# EAGLE board TN Deck _Main Board (EAGLE 9.7.0), part 1 of 2
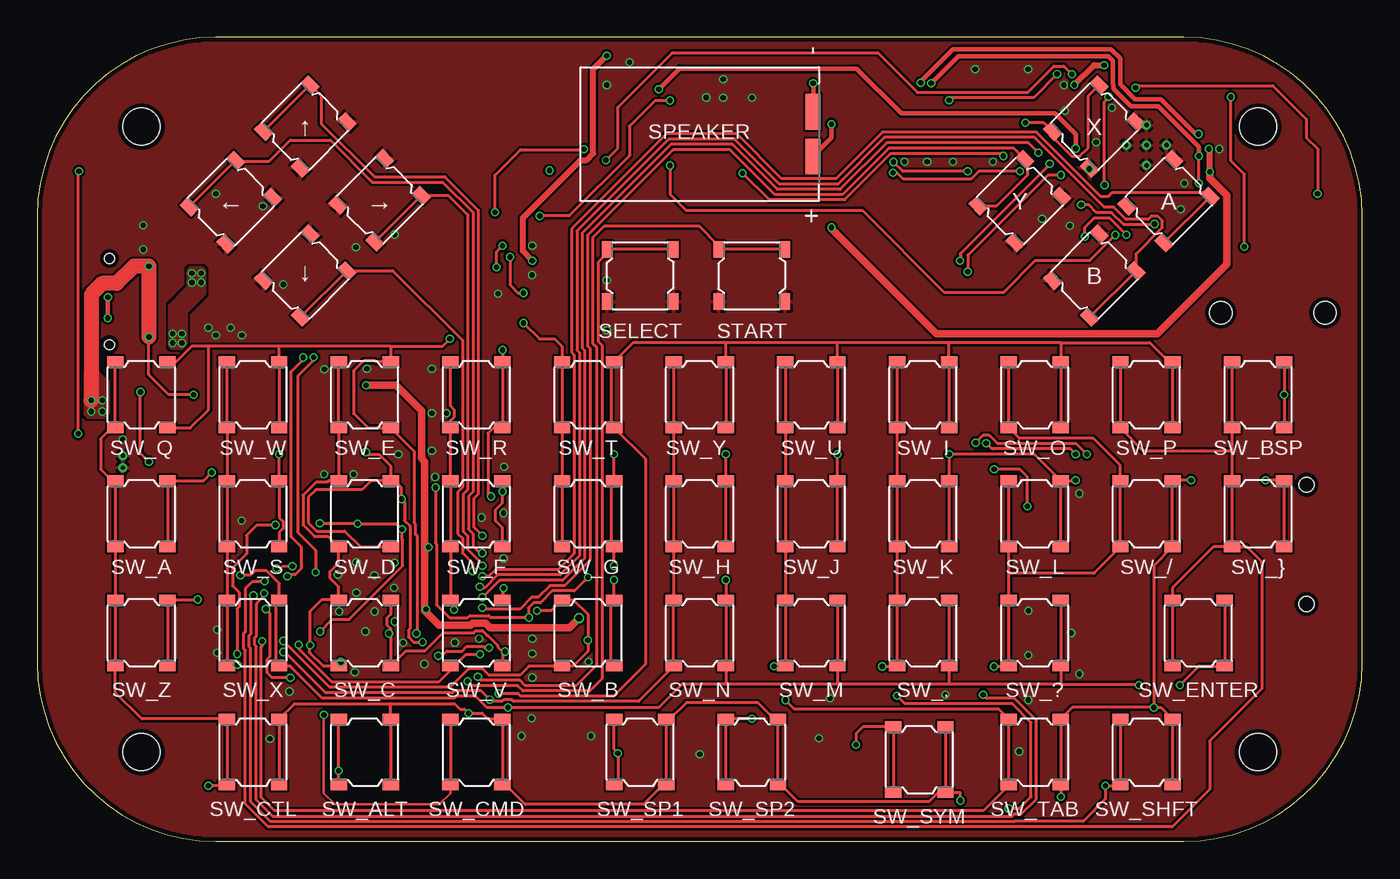
[diagram p0: board, top side]
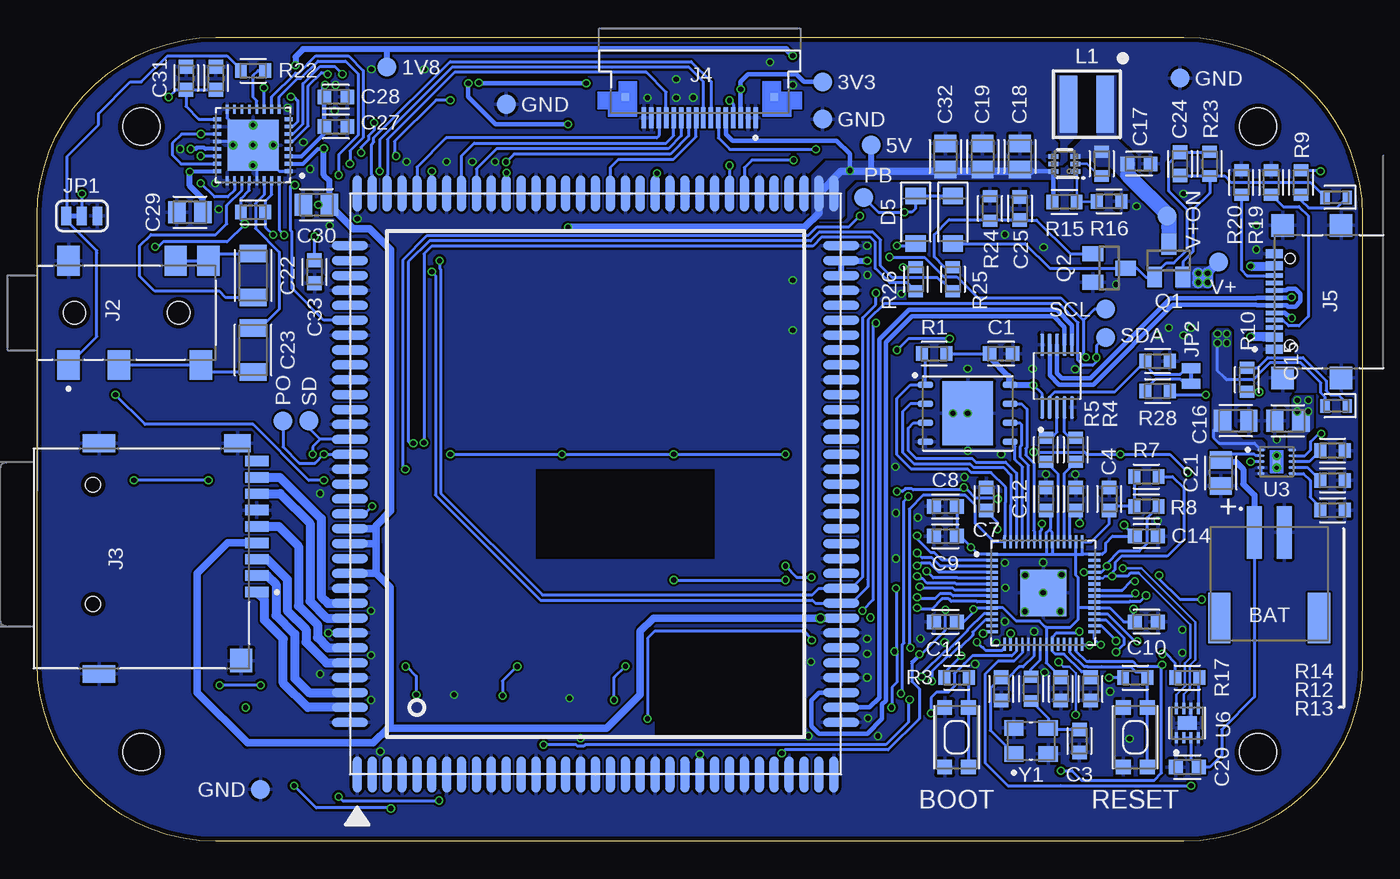
[diagram p1: board, bottom side, seen from below]

Size 89 x 54 mm. Coordinates in mm from the lower left corner, seen from the top.
Outline: 77,54 12,54 arc90 0,42 0,12 arc90 12,0 77,0 arc90 89,12 89,42 arc90 77,54
Copper layers (1*16): Top 0.035mm / dielectric 1.5mm / Bottom 0.035mm
Design rules "PCBWay_2L_152um-Track.dru *": minimum track width 6mil, minimum drill 0.3mm, track to track 6mil, track to pad 6mil, pad to pad 6mil, via to via 6mil, smd to smd 0mil, copper to edge 0.3mm, drill to drill 10mil, minimum pad ring 6mil, minimum via ring 0.1mm, stop-mask expansion 2mil, vias tented up to drill 0.45mm, thermal gap 0.2mm
Holes 2.5 mm at 7,6 82,6 82,48 7,48

## Footprints (pad centres in the part's own frame; a part is rotated, then mirrored left to right if it is on the bottom)
JST_S2B-PH-SM4-TB = smd 1 x 3.5: 1 1,0; 2 -1,0 | smd 1.5 x 3.4: P1 3.35,5.75; P2 -3.35,5.75
KMR2 = smd 1 x 1: 1 2,0.8; 2 2,-0.8; 3 -2,-0.8; 4 -2,0.8
CAPC1608X85 = smd 0.921 x 0.97: 1 -0.775,0; 2 0.775,0
CAPC2012X110 = smd 1.165 x 1.465: 1 -0.875,0; 2 0.875,0
CAPC3216X135 = smd 1.165 x 1.815: 1 -1.475,0; 2 1.475,0
LEDC1608X80N_FLAT-G = smd 0.612 x 0.912: A 0.75,0; C -0.75,0
LEDC1608X80N_FLAT-R = smd 0.612 x 0.912: A 0.75,0; C -0.75,0
SODFL3718X115 = smd 1.115 x 1.361: 1 -1.6,0; 2 1.6,0
TL3315NF100Q = smd 0.7 x 1.1: 1 -2.225,1.75; 2 2.225,1.75; 3 -2.225,-1.75; 4 2.225,-1.75
TENSILITY_54-00177 = smd 2 x 1.5: 1 3.5,-3.9; 2 -3.5,-3.9; 3 3.5,-0.5; 4 -3.5,3.3; 5 -3.5,5.5; 6 3.5,5 | hole 1.5: 0,-3.5; 0,3.5
CUI_MSD-4-A = smd 0.7 x 1.6: 1 2.25,7.75; 2 1.15,7.75; 3 0.05,7.75; 4 -1.05,7.75; 5 -2.15,7.75; 6 -3.25,7.75; 7 -4.35,7.75; 8 -5.45,7.75; CD -6.55,7.75 | smd 1.2 x 1.8: G1 -7.75,6.45 | smd 1.6 x 1.5: G2 6.85,6.7 | smd 1.2 x 2.2: G3 -7.75,-2.85; G4 7.75,-2.85 | hole 1: -4.95,-3.25; 3.05,-3.25
AMPHENOL_SFV16R-1STE1HLF = smd 0.3 x 1.4: 1 -3.75,2.4; 2 -3.25,2.4; 3 -2.75,2.4; 4 -2.25,2.4; 5 -1.75,2.4; 6 -1.25,2.4; 7 -0.75,2.4; 8 -0.25,2.4; 9 0.25,2.4; 10 0.75,2.4; 11 1.25,2.4; 12 1.75,2.4; 13 2.25,2.4; 14 2.75,2.4; 15 3.25,2.4; 16 3.75,2.4 | smd 0.5 x 0.5: SH1 -5,1; SH2 5,1
SAMESKY_UJ20-C-H-G-SMT-5-P16-TR = smd 0.6 x 1.15: A1_B12 -3.2,3.67; A4_B9 -2.4,3.67; A12_B1 3.2,3.67; B4_A9 2.4,3.67 | smd 0.3 x 1.15: A5 -1.25,3.67; A6 -0.25,3.67; A7 0.25,3.67; A8 1.25,3.67; B5 1.75,3.67; B6 0.75,3.67; B7 -0.75,3.67; B8 -1.75,3.67 | smd 1.5 x 1.5: SH1 -5.12,3.105; SH2 5.12,3.105; SH3 -5.12,-0.825; SH4 5.12,-0.825 | hole 0.65: -2.89,2.605; 2.89,2.605
SMT-JUMPER_3_1-NC_TRACE_SILK = smd 0.66 x 1.27: 1 -1.041,0; 2 0,0; 3 1.041,0
SMT-JUMPER_2_NC_TRACE_NO-SILK = smd 0.66 x 1.27: 1 -0.521,0; 2 0.521,0
WE-XHMI_4020 = smd 3.8 x 1.2: 1 0,1.225; 2 0,-1.225
SOT23 = smd 1 x 1.4: 1 -0.95,-1.1; 2 0.95,-1.1; 3 0,1.1
RESC1608X60 = smd 0.799 x 0.974: 1 -0.815,0; 2 0.815,0
SPKR_CMS-160925-078S = smd 2.4 x 1: M 1.5,-7.6; P -1.5,-7.6
B1,27 = smd 1.27 x 1.27: TP 0,0
QFN40P700X700X90-57N = smd 0.84 x 0.2: 1 -3.435,2.6; 2 -3.435,2.2; 3 -3.435,1.8; 4 -3.435,1.4; 5 -3.435,1; 6 -3.435,0.6; 7 -3.435,0.2; 8 -3.435,-0.2; 9 -3.435,-0.6; 10 -3.435,-1; 11 -3.435,-1.4; 12 -3.435,-1.8; 13 -3.435,-2.2; 14 -3.435,-2.6; 29 3.435,-2.6; 30 3.435,-2.2; 31 3.435,-1.8; 32 3.435,-1.4; 33 3.435,-1; 34 3.435,-0.6; 35 3.435,-0.2; 36 3.435,0.2; 37 3.435,0.6; 38 3.435,1; 39 3.435,1.4; 40 3.435,1.8; 41 3.435,2.2; 42 3.435,2.6 | smd 0.2 x 0.84: 15 -2.6,-3.435; 16 -2.2,-3.435; 17 -1.8,-3.435; 18 -1.4,-3.435; 19 -1,-3.435; 20 -0.6,-3.435; 21 -0.2,-3.435; 22 0.2,-3.435; 23 0.6,-3.435; 24 1,-3.435; 25 1.4,-3.435; 26 1.8,-3.435; 27 2.2,-3.435; 28 2.6,-3.435; 43 2.6,3.435; 44 2.2,3.435; 45 1.8,3.435; 46 1.4,3.435; 47 1,3.435; 48 0.6,3.435; 49 0.2,3.435; 50 -0.2,3.435; 51 -0.6,3.435; 52 -1,3.435; 53 -1.4,3.435; 54 -1.8,3.435; 55 -2.2,3.435; 56 -2.6,3.435 | smd 3.1 x 3.1: 57 0,0
IC_BQ25185DLHR = smd 0.5 x 0.2: 1 -1.05,0.8; 2 -1.05,0.4; 3 -1.05,0; 4 -1.05,-0.4; 5 -1.05,-0.8; 6 1.05,-0.8; 7 1.05,-0.4; 8 1.05,0; 9 1.05,0.4; 10 1.05,0.8 | smd 0.5 x 0.5: 11 0,0 | drill 0.3 pad 0.61: 12 0,0.406; 13 0,-0.406
DRL0006A = smd 0.67 x 0.3: 1 -0.74,0.5; 2 -0.74,0; 3 -0.74,-0.5; 4 0.74,-0.5; 5 0.74,0; 6 0.74,0.5
SOP50P490X110-10N = smd 1.5 x 0.28: 1 -2.105,1; 2 -2.105,0.5; 3 -2.105,0; 4 -2.105,-0.5; 5 -2.105,-1; 6 2.105,-1; 7 2.105,-0.5; 8 2.105,0; 9 2.105,0.5; 10 2.105,1
SON50P200X200X80-9N = smd 0.76 x 0.27: 1 -0.985,0.75; 2 -0.985,0.25; 3 -0.985,-0.25; 4 -0.985,-0.75; 5 0.985,-0.75; 6 0.985,-0.25; 7 0.985,0.25; 8 0.985,0.75 | smd 0.9 x 1.3: 9 0,0
IC_ADS125H01IRHBT = smd 0.6 x 0.25: 1 -2.4,1.75; 2 -2.4,1.25; 3 -2.4,0.75; 4 -2.4,0.25; 5 -2.4,-0.25; 6 -2.4,-0.75; 7 -2.4,-1.25; 8 -2.4,-1.75; 17 2.4,-1.75; 18 2.4,-1.25; 19 2.4,-0.75; 20 2.4,-0.25; 21 2.4,0.25; 22 2.4,0.75; 23 2.4,1.25; 24 2.4,1.75 | smd 0.25 x 0.6: 9 -1.75,-2.4; 10 -1.25,-2.4; 11 -0.75,-2.4; 12 -0.25,-2.4; 13 0.25,-2.4; 14 0.75,-2.4; 15 1.25,-2.4; 16 1.75,-2.4; 25 1.75,2.4; 26 1.25,2.4; 27 0.75,2.4; 28 0.25,2.4; 29 -0.25,2.4; 30 -0.75,2.4; 31 -1.25,2.4; 32 -1.75,2.4 | smd 3.45 x 3.45: 33 0,0 | drill 0.3 pad 0.61: 34 0,0; 35 0,1.348; 36 -1.348,0; 37 0,-1.348; 38 1.348,0
SON127P600X500X80-9N = smd 1.04 x 0.44: 1 -2.845,1.905; 2 -2.845,0.635; 3 -2.845,-0.635; 4 -2.845,-1.905; 5 2.845,-1.905; 6 2.845,-0.635; 7 2.845,0.635; 8 2.845,1.905 | smd 3.4 x 4.3: 9 0,0
CM0 = smd 2.4 x 0.6: P$1 -19.5,16; P$2 -19.5,15; P$3 -19.5,14; P$4 -19.5,13; P$5 -19.5,12; P$6 -19.5,11; P$7 -19.5,10; P$8 -19.5,9; P$9 -19.5,8; P$10 -19.5,7; P$11 -19.5,6; P$12 -19.5,5; P$13 -19.5,4; P$14 -19.5,3; P$15 -19.5,2; P$16 -19.5,1; P$17 -19.5,0; P$18 -19.5,-1; P$19 -19.5,-2; P$20 -19.5,-3; P$21 -19.5,-4; P$22 -19.5,-5; P$23 -19.5,-6; P$24 -19.5,-7; P$25 -19.5,-8; P$26 -19.5,-9; P$27 -19.5,-10; P$28 -19.5,-11; P$29 -19.5,-12; P$30 -19.5,-13; P$31 -19.5,-14; P$32 -19.5,-15; P$33 -19.5,-16; P$67 19.5,-16; P$68 19.5,-15; P$69 19.5,-14; P$70 19.5,-13; P$71 19.5,-12; P$72 19.5,-11; P$73 19.5,-10; P$74 19.5,-9; P$75 19.5,-8; P$76 19.5,-7; P$77 19.5,-6; P$78 19.5,-5; P$79 19.5,-4; P$80 19.5,-3; P$81 19.5,-2; P$82 19.5,-1; P$83 19.5,0; P$84 19.5,1; P$85 19.5,2; P$86 19.5,3; P$87 19.5,4; P$88 19.5,5; P$89 19.5,6; P$90 19.5,7; P$91 19.5,8; P$92 19.5,9; P$93 19.5,10; P$94 19.5,11; P$95 19.5,12; P$96 19.5,13; P$97 19.5,14; P$98 19.5,15; P$99 19.5,16 | smd 0.6 x 2.4: P$34 -16,-16.5; P$35 -15,-16.5; P$36 -14,-16.5; P$37 -13,-16.5; P$38 -12,-16.5; P$39 -11,-16.5; P$40 -10,-16.5; P$41 -9,-16.5; P$42 -8,-16.5; P$43 -7,-16.5; P$44 -6,-16.5; P$45 -5,-16.5; P$46 -4,-16.5; P$47 -3,-16.5; P$48 -2,-16.5; P$49 -1,-16.5; P$50 0,-16.5; P$51 1,-16.5; P$52 2,-16.5; P$53 3,-16.5; P$54 4,-16.5; P$55 5,-16.5; P$56 6,-16.5; P$57 7,-16.5; P$58 8,-16.5; P$59 9,-16.5; P$60 10,-16.5; P$61 11,-16.5; P$62 12,-16.5; P$63 13,-16.5; P$64 14,-16.5; P$65 15,-16.5; P$66 16,-16.5; P$100 16,16.5; P$101 15,16.5; P$102 14,16.5; P$103 13,16.5; P$104 12,16.5; P$105 11,16.5; P$106 10,16.5; P$107 9,16.5; P$108 8,16.5; P$109 7,16.5; P$110 6,16.5; P$111 5,16.5; P$112 4,16.5; P$113 3,16.5; P$114 2,16.5; P$115 1,16.5; P$116 0,16.5; P$117 -1,16.5; P$118 -2,16.5; P$119 -3,16.5; P$120 -4,16.5; P$121 -5,16.5; P$122 -6,16.5; P$123 -7,16.5; P$124 -8,16.5; P$125 -9,16.5; P$126 -10,16.5; P$127 -11,16.5; P$128 -12,16.5; P$129 -13,16.5; P$130 -14,16.5; P$131 -15,16.5; P$132 -16,16.5
XTAL_ABM8-272-T3 = smd 1.05 x 1.3: 1 -0.875,1.15; 2 -0.875,-1.15; 3 0.875,-1.15; 4 0.875,1.15

## Placement (x,y rotation side)
BAT  S2B-PH-SM4-TB  [JST_S2B-PH-SM4-TB]  6.25,20.75 180 bottom
BOOT  SPST-NO_SWITCH_KMR2  [KMR2]  27.25,7 270 bottom
C1  0.1uF  [CAPC1608X85]  24.25,32.75 0 bottom
C2  15pF  [CAPC1608X85]  24.25,10.25 90 bottom
C3  15pF  [CAPC1608X85]  19,6.75 90 bottom
C4  1uF  [CAPC1608X85]  17,23 90 bottom
C5  1uF  [CAPC1608X85]  19.25,23 90 bottom
C6  0.1uF  [CAPC1608X85]  18.25,10.25 270 bottom
C7  0.1uF  [CAPC1608X85]  25.25,23 90 bottom
C8  0.1uF  [CAPC1608X85]  28,22.5 180 bottom
C9  0.1uF  [CAPC1608X85]  28,20.5 180 bottom
C10  0.1uF  [CAPC1608X85]  14.5,14.75 0 bottom
C11  0.1uF  [CAPC1608X85]  28,14.75 180 bottom
C12  0.1uF  [CAPC1608X85]  21.25,23 90 bottom
C13  0.1uF  [CAPC1608X85]  20.25,10.25 270 bottom
C14  0.1uF  [CAPC1608X85]  14.5,20.5 0 bottom
C15  10uF  [CAPC2012X110]  5,28.25 180 bottom
C16  22uF  [CAPC2012X110]  8.5,28.25 0 bottom
C17  0.1uF  [CAPC1608X85]  15,45.5 0 bottom
C18  22uF  [CAPC2012X110]  23,46 90 bottom
C19  22uF  [CAPC2012X110]  25.5,46 90 bottom
C20  0.1uF  [CAPC1608X85]  11.75,5 180 bottom
C21  22uF  [CAPC2012X110]  9.5,24.75 270 bottom
C22  100uF/6.3V  [CAPC3216X135]  74.5,38 90 bottom
C23  100uF/6.3V  [CAPC3216X135]  74.5,33 270 bottom
C24  10nF  [CAPC1608X85]  12.25,45.5 90 bottom
C25  10nF  [CAPC1608X85]  23,42.5 90 bottom
C26  0.1uF  [CAPC1608X85]  77,51.25 90 bottom
C27  0.1uF  [CAPC1608X85]  68.95,48 0 bottom
C28  0.1uF  [CAPC1608X85]  68.95,50 0 bottom
C29  10uF  [CAPC2012X110]  78.75,42.25 180 bottom
C30  10uF  [CAPC2012X110]  70.25,42.75 180 bottom
C31  0.1uF  [CAPC1608X85]  79,51.25 90 bottom
C32  22uF  [CAPC2012X110]  28,46 90 bottom
C33  1uF  [CAPC1608X85]  70.38,38.25 270 bottom
D1  CHIP-FLAT-G_0603-0.80MM  [LEDC1608X80N_FLAT-G]  1.75,29.25 180 bottom
D2  CHIP-FLAT-R_0603-0.80MM  [LEDC1608X80N_FLAT-R]  1.75,43.25 180 bottom
D4  MBR0520LT1G  [SODFL3718X115]  27.5,41.75 270 bottom
D5  MBR0520LT1G  [SODFL3718X115]  30,41.75 270 bottom
GPAD_A  TL3315NF100Q  [TL3315NF100Q]  76,43 225 top
GPAD_B  TL3315NF100Q  [TL3315NF100Q]  71,38 225 top
GPAD_D  TL3315NF100Q  [TL3315NF100Q]  18,38 225 top
GPAD_L  TL3315NF100Q  [TL3315NF100Q]  13,42.93 45 top
GPAD_R  TL3315NF100Q  [TL3315NF100Q]  23,43.05 225 top
GPAD_U  TL3315NF100Q  [TL3315NF100Q]  18,48 45 top
GPAD_X  TL3315NF100Q  [TL3315NF100Q]  71,48 45 top
GPAD_Y  TL3315NF100Q  [TL3315NF100Q]  66,43 45 top
J2  54-00177  [TENSILITY_54-00177]  83,35.5 270 bottom
J3  MSD-4-A  [CUI_MSD-4-A]  82,19 270 bottom
J4  SFV16R-1STE1HLF  [AMPHENOL_SFV16R-1STE1HLF]  44.5,51 180 bottom
J5  UJ20-C-H-G-SMT-5-P16-TR  [SAMESKY_UJ20-C-H-G-SMT-5-P16-TR]  2.25,36.25 90 bottom
JP1  JUMPER-SMT_3_1-NC_TRACE_SILK  [SMT-JUMPER_3_1-NC_TRACE_SILK]  86,42 180 bottom
JP2  JUMPER-SMT_2_NC_TRACE_NO-SILK  [SMT-JUMPER_2_NC_TRACE_NO-SILK]  11.5,31.25 270 bottom
L1  1uH  [WE-XHMI_4020]  18.5,49.5 270 bottom
Q1  DMP1045UQ-7  [SOT23]  13,39 0 bottom
Q2  BSS138  [SOT23]  17,38.5 270 bottom
R1  10K  [RESC1608X60]  28.75,32.75 0 bottom
R2  1K  [RESC1608X60]  22.25,10.25 90 bottom
R3  1K  [RESC1608X60]  27.25,11 180 bottom
R4  27  [RESC1608X60]  19.25,26.3 90 bottom
R5  27  [RESC1608X60]  21.25,26.3 270 bottom
R6  10K  [RESC1608X60]  15.25,11 180 bottom
R7  10K  [RESC1608X60]  14.5,24.5 180 bottom
R8  10K  [RESC1608X60]  14.5,22.5 180 bottom
R9  10K  [RESC1608X60]  4.12,44.25 90 bottom
R10  10K  [RESC1608X60]  7.75,31 270 bottom
R11  10K  [RESC1608X60]  17.5,45.5 90 bottom
R12  13K  [RESC1608X60]  2,24.25 180 bottom
R13  10K  [RESC1608X60]  2,22.25 180 bottom
R14  600  [RESC1608X60]  2,26.25 180 bottom
R15  732K  [RESC1608X60]  20,42.95 180 bottom
R16  100K  [RESC1608X60]  17,42.98 180 bottom
R17  10K  [RESC1608X60]  11.75,11 180 bottom
R19  5.1K  [RESC1608X60]  6.12,44.25 90 bottom
R20  5.1K  [RESC1608X60]  8.12,44.25 270 bottom
R21  10K  [RESC1608X60]  74.5,42.25 180 bottom
R22  2.2K  [RESC1608X60]  74.5,51.75 180 bottom
R23  2.2K  [RESC1608X60]  10.25,45.5 270 bottom
R24  100K  [RESC1608X60]  25,42.5 270 bottom
R25  200  [RESC1608X60]  27.5,37.75 90 bottom
R26  200  [RESC1608X60]  30,37.75 90 bottom
R27  10K  [RESC1608X60]  13.75,32.25 0 bottom
R28  10K  [RESC1608X60]  13.75,30.25 180 bottom
RESET  SPST-NO_SWITCH_KMR2  [KMR2]  15.25,7 270 bottom
SELECT  TL3315NF100Q  [TL3315NF100Q]  40.5,38 0 top
SPEAKER  CMS-160925-078S  [SPKR_CMS-160925-078S]  44.5,47.5 90 top
START  TL3315NF100Q  [TL3315NF100Q]  48,38 0 top
SW_.  TL3315NF100Q  [TL3315NF100Q]  59.5,14 90 top
SW_/  TL3315NF100Q  [TL3315NF100Q]  74.5,22 90 top
SW_?  TL3315NF100Q  [TL3315NF100Q]  67,14 90 top
SW_A  TL3315NF100Q  [TL3315NF100Q]  7,22 90 top
SW_ALT  TL3315NF100Q  [TL3315NF100Q]  22,6 90 top
SW_B  TL3315NF100Q  [TL3315NF100Q]  37,14 90 top
SW_BSP  TL3315NF100Q  [TL3315NF100Q]  82,30 90 top
SW_C  TL3315NF100Q  [TL3315NF100Q]  22,14 90 top
SW_CMD  TL3315NF100Q  [TL3315NF100Q]  29.5,6 90 top
SW_CTL  TL3315NF100Q  [TL3315NF100Q]  14.5,6 90 top
SW_D  TL3315NF100Q  [TL3315NF100Q]  22,22 90 top
SW_E  TL3315NF100Q  [TL3315NF100Q]  22,30 90 top
SW_ENTER  TL3315NF100Q  [TL3315NF100Q]  78,14 90 top
SW_F  TL3315NF100Q  [TL3315NF100Q]  29.5,22 90 top
SW_G  TL3315NF100Q  [TL3315NF100Q]  37,22 90 top
SW_H  TL3315NF100Q  [TL3315NF100Q]  44.5,22 90 top
SW_I  TL3315NF100Q  [TL3315NF100Q]  59.5,30 90 top
SW_J  TL3315NF100Q  [TL3315NF100Q]  52,22 90 top
SW_K  TL3315NF100Q  [TL3315NF100Q]  59.5,22 90 top
SW_L  TL3315NF100Q  [TL3315NF100Q]  67,22 90 top
SW_M  TL3315NF100Q  [TL3315NF100Q]  52,14 90 top
SW_N  TL3315NF100Q  [TL3315NF100Q]  44.5,14 90 top
SW_O  TL3315NF100Q  [TL3315NF100Q]  67,30 90 top
SW_P  TL3315NF100Q  [TL3315NF100Q]  74.5,30 90 top
SW_Q  TL3315NF100Q  [TL3315NF100Q]  7,30 90 top
SW_R  TL3315NF100Q  [TL3315NF100Q]  29.5,30 90 top
SW_S  TL3315NF100Q  [TL3315NF100Q]  14.5,22 90 top
SW_SHFT  TL3315NF100Q  [TL3315NF100Q]  74.5,6 90 top
SW_SP1  TL3315NF100Q  [TL3315NF100Q]  40.5,6 90 top
SW_SP2  TL3315NF100Q  [TL3315NF100Q]  48,6 90 top
SW_SYM  TL3315NF100Q  [TL3315NF100Q]  59.25,5.5 90 top
SW_T  TL3315NF100Q  [TL3315NF100Q]  37,30 90 top
SW_TAB  TL3315NF100Q  [TL3315NF100Q]  67,6 90 top
SW_U  TL3315NF100Q  [TL3315NF100Q]  52,30 90 top
SW_V  TL3315NF100Q  [TL3315NF100Q]  29.5,14 90 top
SW_W  TL3315NF100Q  [TL3315NF100Q]  14.5,30 90 top
SW_X  TL3315NF100Q  [TL3315NF100Q]  14.5,14 90 top
SW_Y  TL3315NF100Q  [TL3315NF100Q]  44.5,30 90 top
SW_Z  TL3315NF100Q  [TL3315NF100Q]  7,14 90 top
SW_}  TL3315NF100Q  [TL3315NF100Q]  82,22 90 top
TP1  TPB1,27  [B1,27]  33,46.75 180 bottom
TP2  TPB1,27  [B1,27]  36.25,48.5 180 bottom
TP3  TPB1,27  [B1,27]  36.25,51 180 bottom
TP4  TPB1,27  [B1,27]  65.5,52 180 bottom
TP5  TPB1,27  [B1,27]  17.25,35.75 180 bottom
TP6  TPB1,27  [B1,27]  17.25,33.83 180 bottom
TP7  TPB1,27  [B1,27]  13.12,42 180 bottom
TP8  TPB1,27  [B1,27]  9.66,38.91 180 bottom
TP9  TPB1,27  [B1,27]  70.75,28.25 180 bottom
TP10  TPB1,27  [B1,27]  72.49,28.24 180 bottom
TP11  TPB1,27  [B1,27]  33.5,43.25 180 bottom
TP12  TPB1,27  [B1,27]  57.5,49.5 180 bottom
TP13  TPB1,27  [B1,27]  74,3.5 180 bottom
TP14  TPB1,27  [B1,27]  12.25,51.25 180 bottom
U2  SC0914(13)  [QFN40P700X700X90-57N]  21.43,16.68 0 bottom
U3  BQ25185DLHR  [IC_BQ25185DLHR]  5.75,25.5 0 bottom
U4  TPS61023DRLRDRL0006A  [DRL0006A]  20,45.5 180 bottom
U5  FSUSB42MUX  [SOP50P490X110-10N]  20.5,31.25 90 bottom
U6  MAX17048G+T10  [SON50P200X200X80-9N]  11.75,7.95 90 bottom
U7  TLV320DAC3100IRHBR  [IC_ADS125H01IRHBT]  74.5,46.75 180 bottom
U8  W25Q32JVZPIQ  [SON127P600X500X80-9N]  26.5,28.75 0 bottom
U$1  CM0100000  [CM0]  51.5,24 90 bottom
Y1  ABM8-272-T3  [XTAL_ABM8-272-T3]  22.25,6.75 90 bottom

## Library data of the parts
BAT = S2B-PH-SM4-TB; MANUFACTURER: JST; VENDOR: Digikey; VPN: 455-S2B-PH-SM4-TBCT-ND
BOOT RESET = Switch; CATEGORY: Switches; DATASHEET: https://www.ckswitches.com/media/1479/kmr2.pdf; DESCRIPTION: Tactile Switch SPST-NO Top Actuated Surface Mount; MANUFACTURER: C&K; MPN: KMR211G LFS; OPERATING_TEMPERATURE: -40°C ~ 85°C; PACKAGE_SIZE: NA; PACKAGE_TYPE: Surface Mount; PART_STATUS: Active; ROHS: Compliant; SERIES: KMR2; SUBCATEGORY: Tactile Switches; TYPE: SPST-NO; VENDOR: Digikey; VPN: 401-1426-1-ND
C1 C6-C14 C17 C20 C26-C28 C31 C33 = Capacitor; CATEGORY: Capacitor; PACKAGE_SIZE: 0603; PACKAGE_TYPE: Surface Mount; SUBCATEGORY: Ceramic Capacitors; TYPE: MLCC; VENDOR: Digikey; VPN: 399-C0603C104K3RACTUCT-ND
C2 C3 = Capacitor; CATEGORY: Capacitor; PACKAGE_SIZE: 0603; PACKAGE_TYPE: Surface Mount; SUBCATEGORY: Ceramic Capacitors; TYPE: MLCC; VENDOR: Digikey; VPN: 732-7761-1-ND
C4 C5 = Capacitor; CATEGORY: Capacitor; PACKAGE_SIZE: 0603; PACKAGE_TYPE: Surface Mount; SUBCATEGORY: Ceramic Capacitors; TYPE: MLCC; VENDOR: Digikey; VPN: 399-C0603C105K4RACTUCT-ND
C15 C29 C30 = Capacitor; CATEGORY: Capacitor; PACKAGE_SIZE: 0805; PACKAGE_TYPE: Surface Mount; SUBCATEGORY: Ceramic Capacitors; TYPE: MLCC; VENDOR: Digikey; VPN: 1292-0805X106K250CT-ND
C16 C18 C19 C21 C32 = Capacitor; CATEGORY: Capacitor; PACKAGE_SIZE: 0805; PACKAGE_TYPE: Surface Mount; SUBCATEGORY: Ceramic Capacitors; TYPE: MLCC; VENDOR: Digikey; VPN: 4713-GMC21X5R226M16NTCT-ND
C22 C23 = Capacitor; CATEGORY: Capacitor; PACKAGE_SIZE: 1206; PACKAGE_TYPE: Surface Mount; SUBCATEGORY: Ceramic Capacitors; TYPE: MLCC; VENDOR: Digikey; VPN: 1276-CL31A107MQHNNWECT-ND
C24 C25 = Capacitor; CATEGORY: Capacitor; PACKAGE_SIZE: 0603; PACKAGE_TYPE: Surface Mount; SUBCATEGORY: Ceramic Capacitors; TYPE: MLCC; VENDOR: Digikey; VPN: 399-C0603C103K4RACTUCT-ND
D1 = LED; CATEGORY: LED; COLOR: Green; DESCRIPTION: Green LED Indication 0603 (1608 Metric); PACKAGE_SIZE: 0603; PACKAGE_TYPE: Surface Mount; SUBCATEGORY: Chip LED; TYPE: Square with Flat Top; VENDOR: Digikey; VPN: 732-4980-1-ND
D2 = LED; CATEGORY: LED; COLOR: Red; DESCRIPTION: Red LED Indication 0603 (1608 Metric); PACKAGE_SIZE: 0603; PACKAGE_TYPE: Surface Mount; SUBCATEGORY: Chip LED; TYPE: Square with Flat Top; VENDOR: Digikey; VPN: 732-4978-1-ND
D4 D5 = Diode; CATEGORY: Diode; DESCRIPTION: DIODE SCHOTTKY 20V 500MA SOD123; MANUFACTURER: ON Semiconductor; MPN: MBR0520LT1G; SUB-CATEGORY: Schottky; VENDOR: Digikey; VPN: MBR0520LT1GOSCT-ND
GPAD_A GPAD_B GPAD_D GPAD_L GPAD_R GPAD_U GPAD_X GPAD_Y SELECT START SW_. SW_/ SW_? SW_A SW_ALT SW_B SW_BSP SW_C SW_CMD SW_CTL SW_D SW_E SW_ENTER SW_F SW_G SW_H SW_I SW_J SW_K SW_L SW_M SW_N SW_O SW_P SW_Q SW_R SW_S SW_SHFT SW_SP1 SW_SP2 SW_SYM SW_T SW_TAB SW_U SW_V SW_W SW_X SW_Y SW_Z SW_} = Switch; CREATED_BY: PCBLayout.com; DIGIKEY_PARTNO: EG4620TR-ND; MANUFACTURER: E-Switch; MPN: TL3315NF100Q; VENDOR: Digikey; VPN: EG4620CT-ND
J2 = 54-00177; MANUFACTURER: TENSILITY; MAXIMUM_PACKAGE_HEIGHT: 4.5mm; PARTREV: A; SNAPEDA_PN: 54-00177; STANDARD: Manufacturer Recommendations; VENDOR: Digikey; VPN: 839-54-00177CT-ND
J3 = MSD-4-A; MANUFACTURER: CUI Devices; MAXIMUM_PACKAGE_HEIGHT: 2.00mm; PARTREV: 1.0; STANDARD: Manufacturer Recommendations; VENDOR: Digikey; VPN: 2223-MSD-4-ACT-ND
J4 = SFV16R-1STE1HLF; MANUFACTURER: Amphenol; MAXIMUM_PACKAGE_HEIGHT: 2.36mm; PARTREV: B; STANDARD: Manufacturer Recommendations; VENDOR: Digikey; VPN: 609-4313-1-ND
J5 = UJ20-C-H-G-SMT-5-P16-TR; CREATOR: AMINA; MANUFACTURER: Same Sky; MAXIMUM_PACKAGE_HEIGHT: 3.41mm; PARTREV: 1.01; STANDARD: Manufacturer Recommendations; VENDOR: Digikey; VERIFIER: Your name, use the same always; VPN: 2223-UJ20-C-H-G-SMT-5-P16-TRCT-ND
JP1 JP2 = SparkFun-Jumpers
L1 = Wurth_Power Magnetics_WE-XHMI; DATASHEET-URL: https://www.we-online.com/redexpert/spec/74439323010?ae; FRES: 60MHz; HEIGHT: 2mm; IRP: 10A@40K; ISAT: 10.2A@30%; L: 1uH; LENGTH: 4.3mm; MOUNT: SMT; PART-NUMBER: 74439323010; RDC-MAX: 13.44mOhm; RDC-TYP: 10.7mOhm; SIZE: 4020; VENDOR: Digikey; VPN: 732-11310-1-ND; WIDTH: 4.3mm
Q1 = Transistor; CATEGORY: Transistor; DATASHEET: https://www.analog.com/media/en/package-pcb-resources/package/pkg_pdf/ltc-legacy-sot-23/sot3%2005-08-1631%20rev%20d.pdf; DESCRIPTION: Generic P-Channel MOSFET Surface Mount SOT23 Package; PACKAGE_SIZE: SOT23; PACKAGE_TYPE: Surface Mount; SUBCATEGORY: MOSFET; TYPE: P-Channel; VENDOR: Digikey; VPN: 31-DMP1045UQ-7CT-ND
Q2 = Transistor; CATEGORY: Transistor; DATASHEET: https://www.analog.com/media/en/package-pcb-resources/package/pkg_pdf/ltc-legacy-sot-23/sot3%2005-08-1631%20rev%20d.pdf; DESCRIPTION: Generic N Channel MOSFET SOT23-GSD Package Surface Mount; PACKAGE_SIZE: SOT23; PACKAGE_TYPE: Surface Mount; SUBCATEGORY: MOSFET; TYPE: N-Channel; VENDOR: Digikey; VPN: BSS138CT-ND
R1 R6-R11 R13 R17 R21 R23 R27 R28 = Resistor; CATEGORY: Resistors; DESCRIPTION: Chip Resistor 1.60 X 0.82 X 0.60 mm body 0603(1608-METRIC) Package; PACKAGE_SIZE: 0603; PACKAGE_TYPE: Surface Mount; VENDOR: Digikey; VPN: 541-10.0KHCT-ND
R2 R3 = Resistor; CATEGORY: Resistors; DESCRIPTION: Chip Resistor 1.60 X 0.82 X 0.60 mm body 0603(1608-METRIC) Package; PACKAGE_SIZE: 0603; PACKAGE_TYPE: Surface Mount; VENDOR: Digikey; VPN: 541-1.00KHCT-ND
R4 R5 = Resistor; CATEGORY: Resistors; DESCRIPTION: Chip Resistor 1.60 X 0.82 X 0.60 mm body 0603(1608-METRIC) Package; PACKAGE_SIZE: 0603; PACKAGE_TYPE: Surface Mount; VENDOR: Digikey; VPN: 541-27.0HCT-ND
R12 = Resistor; CATEGORY: Resistors; DESCRIPTION: Chip Resistor 1.60 X 0.82 X 0.60 mm body 0603(1608-METRIC) Package; PACKAGE_SIZE: 0603; PACKAGE_TYPE: Surface Mount; VENDOR: Digikey; VPN: 541-13.0KHCT-ND
R14 = Resistor; CATEGORY: Resistors; DESCRIPTION: Chip Resistor 1.60 X 0.82 X 0.60 mm body 0603(1608-METRIC) Package; PACKAGE_SIZE: 0603; PACKAGE_TYPE: Surface Mount; VENDOR: Digikey; VPN: 541-604HCT-ND
R15 = Resistor; CATEGORY: Resistors; DESCRIPTION: Chip Resistor 1.60 X 0.82 X 0.60 mm body 0603(1608-METRIC) Package; PACKAGE_SIZE: 0603; PACKAGE_TYPE: Surface Mount; VENDOR: Digikey; VPN: 541-732KHCT-ND
R16 R24 = Resistor; CATEGORY: Resistors; DESCRIPTION: Chip Resistor 1.60 X 0.82 X 0.60 mm body 0603(1608-METRIC) Package; PACKAGE_SIZE: 0603; PACKAGE_TYPE: Surface Mount; VENDOR: Digikey; VPN: 541-100KHCT-ND
R19 R20 = Resistor; CATEGORY: Resistors; DESCRIPTION: Chip Resistor 1.60 X 0.82 X 0.60 mm body 0603(1608-METRIC) Package; PACKAGE_SIZE: 0603; PACKAGE_TYPE: Surface Mount; VENDOR: Digikey; VPN: 541-5.10KHCT-ND
R22 = Resistor; CATEGORY: Resistors; DESCRIPTION: Chip Resistor 1.60 X 0.82 X 0.60 mm body 0603(1608-METRIC) Package; PACKAGE_SIZE: 0603; PACKAGE_TYPE: Surface Mount; VENDOR: Digikey; VPN: 541-2.20KHCT-ND
R25 R26 = Resistor; CATEGORY: Resistors; DESCRIPTION: Chip Resistor 1.60 X 0.82 X 0.60 mm body 0603(1608-METRIC) Package; PACKAGE_SIZE: 0603; PACKAGE_TYPE: Surface Mount; VENDOR: Digikey; VPN: 541-200HCT-ND
SPEAKER = CMS-160925-078S; MANUFACTURER: CUI INC; PART_REV: 1.0; STANDARD: Manufacturer recommendations; VENDOR: Digikey; VPN: 102-4619-ND
TP1-TP14 = testpad
U2 = SC0914_13_; MANUFACTURER: Raspberry Pi; MAXIMUM_PACKAGE_HEIGHT: 0.90 mm; PARTREV: 2.2; STANDARD: IPC 7351B; VENDOR: Digikey; VPN: 2648-SC0914(13)CT-ND
U3 = BQ25185DLHR; CREATOR: AMINA; MANUFACTURER: Texas Instruments; MAXIMUM_PACKAGE_HEIGHT: 0.8mm; PARTREV: OCTOBER 2023; SNAPEDA_PACKAGE_ID: 124517; STANDARD: Manufacturer Recommendations; VENDOR: Digikey; VPN: 296-BQ25185DLHRCT-ND
U4 = TPS61023DRLR; COPYRIGHT: Copyright (C) 2026 Ultra Librarian. All rights reserved.; DATASHEET: https://www.ti.com/lit/gpn/tps61023; DESCRIPTION: 3.7-A boost converter with 0.5-V ultra-low input voltage 6-SOT-5X3 -40 to 125; MANUFACTURER_NAME: Texas Instruments; MANUFACTURER_PART_NUMBER: TPS61023DRLR; REFDES: RefDes; TYPE: TYPE; VENDOR: Digikey; VPN: 296-TPS61023DRLRCT-ND
U5 = FSUSB42MUX; MANUFACTURER: ON Semiconductor; PARTREV: 1.25; STANDARD: IPC-7351B; VENDOR: Digikey; VPN: FSUSB42MUXCT-ND
U6 = MAX17048G_T10; VENDOR: Digikey; VPN: MAX17048G+T10CT-ND
U7 = TLV320DAC3100IRHBR; VENDOR: Digikey; VPN: 296-27216-1-ND
U8 = W25Q32JVZPIQ; CHECK_PRICES: https://www.snapeda.com/parts/W25Q32JVZPIQ/Winbond/view-part/?ref=eda; DESCRIPTION: FLASH - NOR Memory IC 32Mb (4M x 8) SPI - Quad I/O 133 MHz 8-WSON (6x5); DIGIKEY_PART_NUMBER: 256-W25Q32JVZPIQ-TUBE-ND; MF: Winbond; MP: W25Q32JVZPIQ; PACKAGE: WSON-8 Winbond; SNAPEDA_LINK: https://www.snapeda.com/parts/W25Q32JVZPIQ/Winbond/view-part/?ref=snap; VENDOR: Digikey; VPN: 256-W25Q32JVZPIQ-TUBE-ND
U$1 = CM0; VENDOR: EDATEC
Y1 = ABM8-272-T3; CREATOR: DIZAR; MANUFACTURER: ABRACON; MAXIMUM_PACKAGE_HEIGHT: 0.8mm; PARTREV: 07-29-20; STANDARD: Manufacturer Recommendations; VENDOR: Digikey; VPN: 535-ABM8-272-T3CT-ND

## Nets
1V1: C5.1 C6.1 C7.1 U2.23 U2.45 U2.50
1V8: C27.1 C28.1 TP4.TP U7.3 U$1.P$64 U$1.P$65
3V3: C1.1 C4.1 C8.1 C9.1 C10.1 C11.1 C12.1 C13.1 C14.1 C26.1 C30.1 C31.1 J3.4 J4.3 R1.2 R6.2 R7.2 R8.2 R17.2 R21.2 TP3.TP U2.1 U2.10 U2.22 U2.33 U2.42 U2.43 U2.44 U2.48 U2.49 U5.1 U7.2 U7.17 U7.28 U8.8 U$1.P$41 U$1.P$119 U$1.P$120 U$1.P$122
5V: C18.1 C19.1 C29.1 C32.1 J4.5 R15.2 TP1.TP U4.6 U7.21 U7.24 U$1.P$67 U$1.P$68
!ACT_LED: J4.4 U$1.P$118
!BAT_ALERT: R17.1 U6.5
!RP2040_BOOT: BOOT.1 BOOT.4 R3.1
!RP2040_RESET: R6.1 RESET.1 RESET.4 U2.26
!TOUCH_CS: J4.8 U$1.P$89
!TOUCH_IRQ: J4.7 U$1.P$98
CM0_USB_N: U5.6 U$1.P$35
CM0_USB_P: U5.7 U$1.P$36
COL0: SW_A.1 SW_A.2 SW_CTL.1 SW_CTL.2 SW_Q.1 SW_Q.2 SW_Z.1 SW_Z.2 U2.18
COL1: SW_ALT.1 SW_ALT.2 SW_S.1 SW_S.2 SW_W.1 SW_W.2 SW_X.1 SW_X.2 U2.27
COL2: SW_C.1 SW_C.2 SW_CMD.1 SW_CMD.2 SW_D.1 SW_D.2 SW_E.1 SW_E.2 U2.28
COL3: SW_F.1 SW_F.2 SW_R.1 SW_R.2 SW_SP1.1 SW_SP1.2 SW_V.1 SW_V.2 U2.29
COL4: SW_B.1 SW_B.2 SW_G.1 SW_G.2 SW_SP2.1 SW_SP2.2 SW_T.1 SW_T.2 U2.30
COL5: SW_H.1 SW_H.2 SW_N.1 SW_N.2 SW_SYM.1 SW_SYM.2 SW_Y.1 SW_Y.2 U2.31
COL6: SW_J.1 SW_J.2 SW_M.1 SW_M.2 SW_TAB.1 SW_TAB.2 SW_U.1 SW_U.2 U2.32
COL7: SW_..1 SW_..2 SW_I.1 SW_I.2 SW_K.1 SW_K.2 SW_SHFT.1 SW_SHFT.2 U2.34
COL8: SW_/.1 SW_/.2 SW_?.1 SW_?.2 SW_L.1 SW_L.2 SW_O.1 SW_O.2 U2.35
COL9: SW_BSP.1 SW_BSP.2 SW_ENTER.1 SW_ENTER.2 SW_P.1 SW_P.2 SW_}.1 SW_}.2 U2.36
DAC_BCLK: U7.7 U$1.P$105
DAC_DIN: U7.5 U$1.P$73
DAC_GPIO: U7.32 U$1.P$74
DAC_WCLK: U7.6 U$1.P$79
DISPLAY_BL: J4.9 U$1.P$82
DISPLAY_CS: J4.11 U$1.P$91
DISPLAY_DC: J4.10 U$1.P$94
DPAD_DOWN: GPAD_D.1 GPAD_D.2 U2.5
DPAD_LEFT: GPAD_L.1 GPAD_L.2 U2.3
DPAD_RIGHT: GPAD_R.1 GPAD_R.2 U2.4
DPAD_UP: GPAD_U.1 GPAD_U.2 U2.2
GND: BAT.2 BOOT.2 BOOT.3 C1.2 C2.1 C3.1 C4.2 C5.2 C6.2 C7.2 C8.2 C9.2 C10.2 C11.2 C12.2 C13.2 C14.2 C15.2 C16.2 C17.2 C18.2 C19.2 C20.2 C21.2 C25.2 C26.2 C27.2 C28.2 C29.2 C30.2 C31.2 C32.2 C33.2 GPAD_A.3 GPAD_A.4 GPAD_B.3 GPAD_B.4 GPAD_D.3 GPAD_D.4 GPAD_L.3 GPAD_L.4 GPAD_R.3 GPAD_R.4 GPAD_U.3 GPAD_U.4 GPAD_X.3 GPAD_X.4 GPAD_Y.3 GPAD_Y.4 J2.2 J3.6 J3.G1 J3.G2 J3.G3 J3.G4 J4.1 J4.2 J4.15 J4.16 J5.A1_B12 J5.A12_B1 J5.SH1 J5.SH2 J5.SH3 J5.SH4 JP1.1 Q2.2 R12.1 R13.1 R14.1 R16.1 R19.2 R20.1 R24.1 R27.2 RESET.2 RESET.3 SELECT.3 SELECT.4 START.3 START.4 TP2.TP TP12.TP TP13.TP TP14.TP U2.19 U2.57 U3.4 U3.5 U3.11 U3.12 U3.13 U4.4 U5.5 U5.10 U6.1 U6.4 U6.6 U6.9 U7.1 U7.16 U7.18 U7.20 U7.25 U7.29 U7.33 U7.34 U7.35 U7.36 U7.37 U7.38 U8.4 U8.9 U$1.P$1 U$1.P$4 U$1.P$7 U$1.P$10 U$1.P$13 U$1.P$16 U$1.P$21 U$1.P$24 U$1.P$27 U$1.P$30 U$1.P$33 U$1.P$34 U$1.P$37 U$1.P$40 U$1.P$45 U$1.P$48 U$1.P$51 U$1.P$54 U$1.P$57 U$1.P$60 U$1.P$63 U$1.P$66 U$1.P$69 U$1.P$72 U$1.P$75 U$1.P$78 U$1.P$81 U$1.P$84 U$1.P$87 U$1.P$90 U$1.P$93 U$1.P$96 U$1.P$99 U$1.P$100 U$1.P$103 U$1.P$106 U$1.P$109 U$1.P$112 U$1.P$115 U$1.P$123 U$1.P$126 U$1.P$129 U$1.P$132 Y1.2 Y1.4
GPAD_A: GPAD_A.1 GPAD_A.2 U2.6
GPAD_B: GPAD_B.1 GPAD_B.2 U2.7
GPAD_X: GPAD_X.1 GPAD_X.2 U2.8
GPAD_Y: GPAD_Y.1 GPAD_Y.2 U2.9
HPL: C22.1 U7.27
HPR: C23.1 U7.30
MIC: J2.1 JP1.3 R22.2
MICBIAS: R22.1 U7.12
MICDET: JP1.2 U7.11
N$1: R12.2 U3.7
N$2: R14.2 U3.8
N$3: R13.2 U3.6
N$4: R9.2 U3.9
N$5: D2.C R9.1
N$6: R10.2 U3.3
N$7: D1.C R10.1
N$8: R11.1 U4.2
N$10: C3.2 R2.1 Y1.3
N$12: J5.A5 R19.1
N$13: R15.1 R16.2 U4.1
N$16: J5.B5 R20.2
N$17: C33.1 R21.1 U7.31
N$19: C25.1 Q2.1 R24.2 R25.2
N$20: C24.2 D4.2 Q1.1 Q2.3 R23.1
N$21: D5.2 R26.2
N$23: JP2.2 R28.2
OUTL: C22.2 J2.4 J2.5
OUTR: C23.2 J2.3 J2.6
PWR_BTN: D4.1 D5.1 J4.6 TP11.TP
PWR_OFF: R25.1 TP10.TP U$1.P$114
QSPI_SCLK: U2.52 U8.6
QSPI_SD0: U2.53 U8.5
QSPI_SD1: U2.55 U8.2
QSPI_SD2: U2.54 U8.3
QSPI_SD3: U2.51 U8.7
QSPI_SS: R1.1 R3.2 U2.56 U8.1
ROW0: SW_E.3 SW_E.4 SW_I.3 SW_I.4 SW_O.3 SW_O.4 SW_P.3 SW_P.4 SW_Q.3 SW_Q.4 SW_R.3 SW_R.4 SW_T.3 SW_T.4 SW_U.3 SW_U.4 SW_W.3 SW_W.4 SW_Y.3 SW_Y.4 U2.14
ROW1: SW_A.3 SW_A.4 SW_BSP.3 SW_BSP.4 SW_D.3 SW_D.4 SW_F.3 SW_F.4 SW_G.3 SW_G.4 SW_H.3 SW_H.4 SW_J.3 SW_J.4 SW_K.3 SW_K.4 SW_L.3 SW_L.4 SW_S.3 SW_S.4 U2.15
ROW2: SW_..3 SW_..4 SW_?.3 SW_?.4 SW_B.3 SW_B.4 SW_C.3 SW_C.4 SW_ENTER.3 SW_ENTER.4 SW_M.3 SW_M.4 SW_N.3 SW_N.4 SW_V.3 SW_V.4 SW_X.3 SW_X.4 SW_Z.3 SW_Z.4 U2.16
ROW3: SW_/.3 SW_/.4 SW_ALT.3 SW_ALT.4 SW_CMD.3 SW_CMD.4 SW_CTL.3 SW_CTL.4 SW_SHFT.3 SW_SHFT.4 SW_SP1.3 SW_SP1.4 SW_SP2.3 SW_SP2.4 SW_SYM.3 SW_SYM.4 SW_TAB.3 SW_TAB.4 SW_}.3 SW_}.4 U2.17
RP2040_USB_N: R4.2 U5.4
RP2040_USB_P: R5.1 U5.3
RP2040_USBT_N: R4.1 U2.46
RP2040_USBT_P: R5.2 U2.47
SCL: R8.1 TP5.TP U2.39 U6.7 U7.10 U$1.P$43
SD_CLK: J3.5 U$1.P$127
SD_CMD: J3.3 U$1.P$128
SD_DAT0: J3.7 U$1.P$125
SD_DAT1: J3.8 U$1.P$124
SD_DAT2: J3.1 U$1.P$131
SD_DAT3: J3.2 U$1.P$130
SDA: R7.1 TP6.TP U2.38 U6.8 U7.9 U$1.P$42
SELECT: SELECT.1 SELECT.2 U2.12
SHT_DWN: R26.1 TP9.TP U$1.P$113
SPI_CLK: J4.12 U$1.P$92
SPI_MISO: J4.14 U$1.P$95
SPI_MOSI: J4.13 U$1.P$97
SPKM: SPEAKER.M U7.19 U7.23
SPKP: SPEAKER.P U7.22 U7.26
START: START.1 START.2 U2.11
SW: L1.2 U4.5
SWCLK: U2.24
SWDIO: U2.25
USB_N: J5.A7 J5.B7 U5.8
USB_P: J5.A6 J5.B6 U5.9
USB_SELECT: JP2.1 R27.1 U5.2
VBAT: BAT.1 C20.1 C21.1 U3.2 U6.2 U6.3
VBUS: C15.1 J5.A4_B9 J5.B4_A9 R28.1 U3.10
VSYS: C16.1 C24.1 D1.A D2.A Q1.2 R23.2 TP8.TP U3.1
VSYS_ON: C17.1 L1.1 Q1.3 R11.2 TP7.TP U4.3
XIN: C2.2 U2.20 Y1.1
XOUT: R2.2 U2.21